# EAGLE board XL6010 (EAGLE 7.6.0)

No outline drawn. Coordinates in mm, seen from the top.
Copper layers (1*16): Top 0.035mm / dielectric 1.5mm / Bottom 0.035mm
Design rules "default": minimum track width 10mil, minimum drill 24mil, track to track 8mil, track to pad 8mil, pad to pad 8mil, via to via 8mil, smd to smd 8mil, copper to edge 40mil, drill to drill 8mil, minimum pad ring 10mil, minimum via ring 8mil, stop-mask expansion 4mil, vias tented up to drill 0mil, thermal gap 10mil

## Footprints (pad centres in the part's own frame; a part is rotated, then mirrored left to right if it is on the bottom)
1X01 = drill 1.016 octagon: 1 0,0

## Placement (x,y rotation side)
JP1  [1X01]  44.66,66.52 0 top
JP2  [1X01]  23.87,66.53 0 top
JP3  [1X01]  44.65,20.3 0 top
JP4  [1X01]  23.85,20.28 0 top

## Library data of the parts
JP1-JP4 = pinhead

## Nets
12V: JP1.1
GND: JP4.1
GND24V: JP2.1
VCC: JP3.1

## Tracks (layer width: path | path; a pad name or v marks a point on that pad's centre or on a via)
(copper drawn outside any net)
  shapes: Top area x4